# Altium PCB 掌控扩展板ASC.PcbDoc
Units mm, origin at the board's own origin, x right, y up, seen from the top; angles counter-clockwise.
Board outline 76 x 53.5 mm, 2 copper layers (Top Layer, Bottom Layer); 50 components, 37 nets, 188 pads, 49 vias.
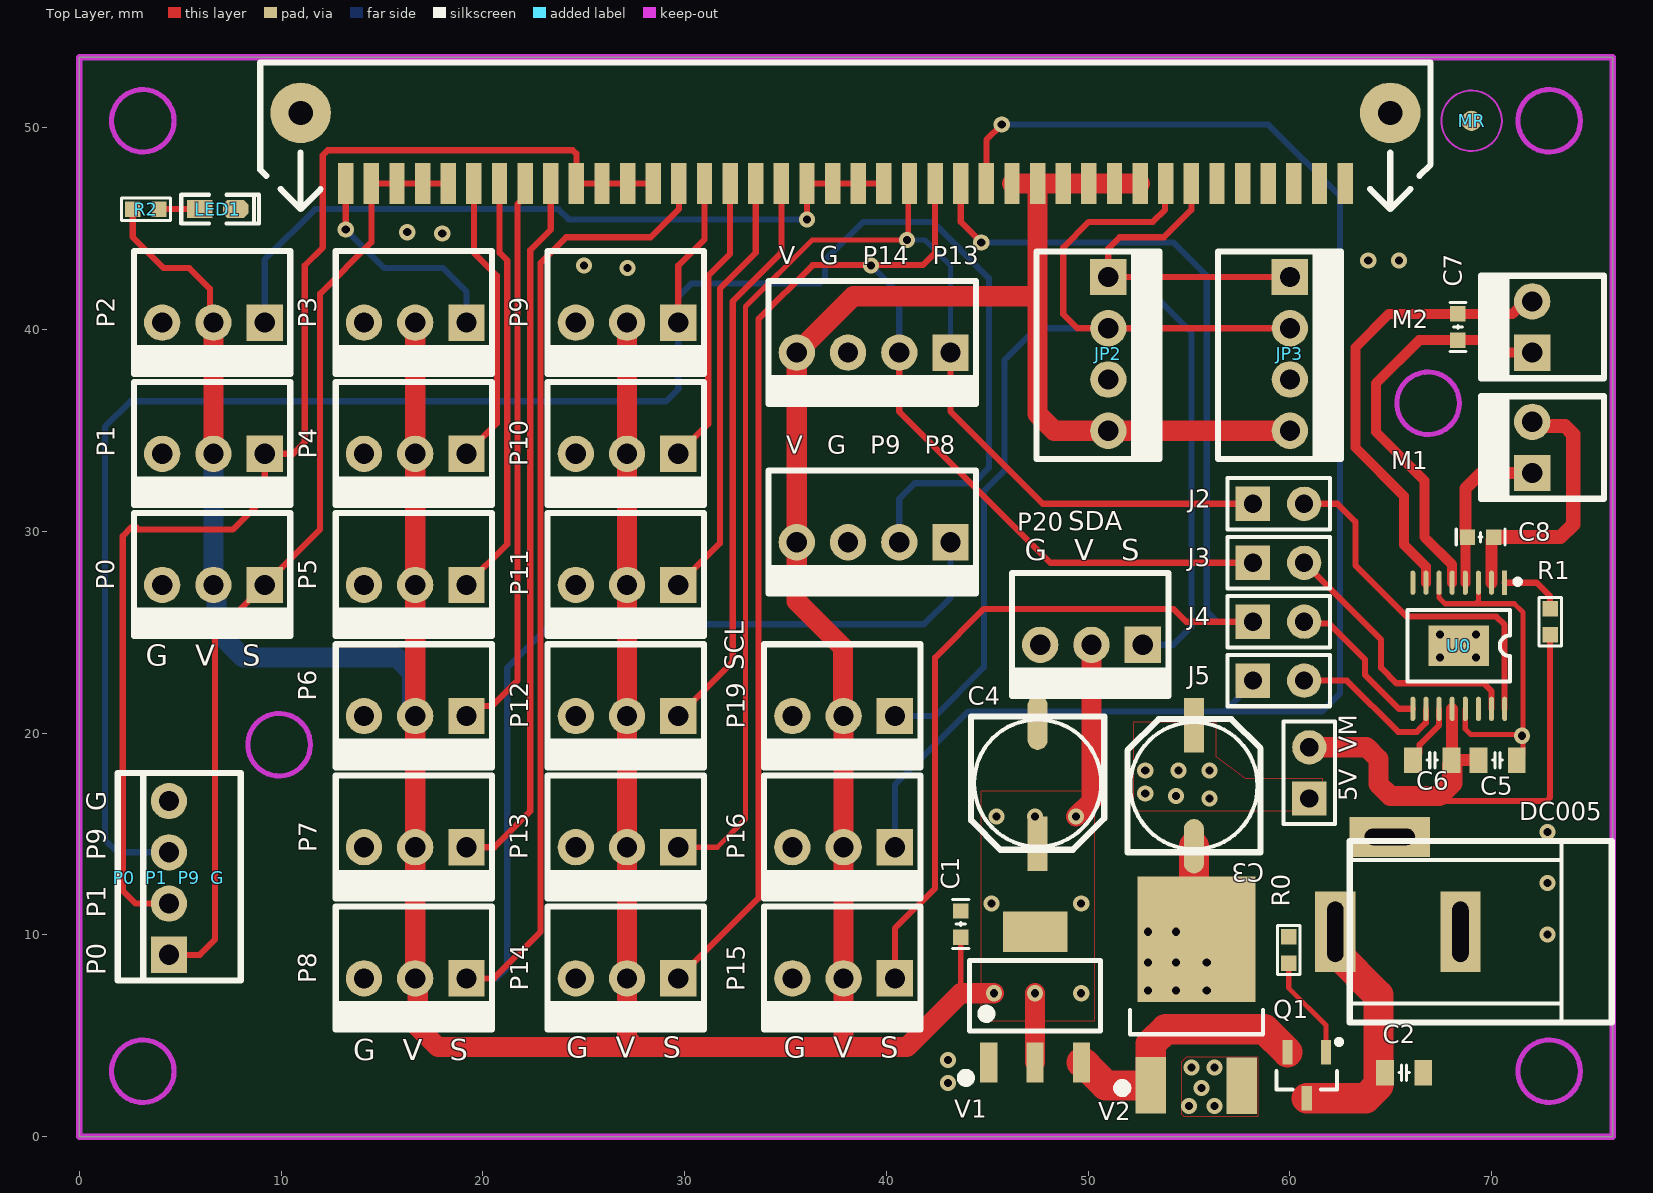
[diagram p0: Top Layer view]
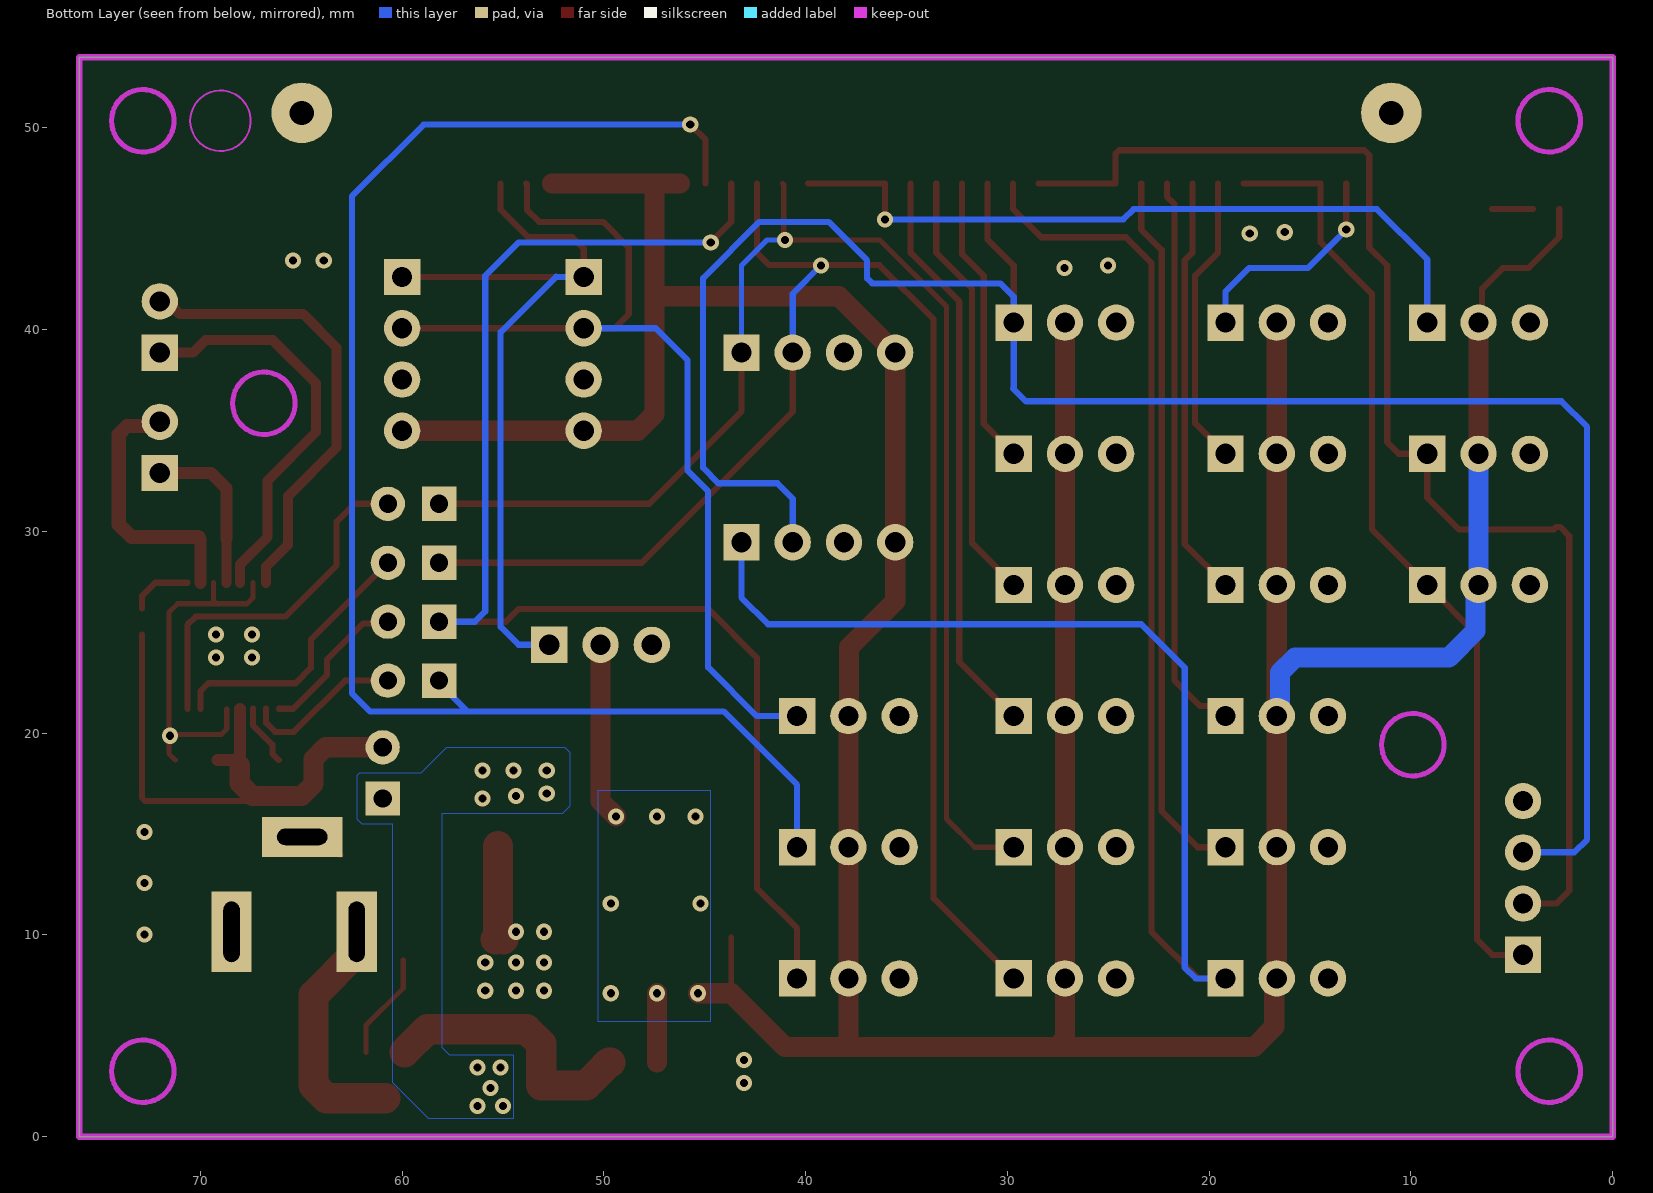
[diagram p1: Bottom Layer view, seen from below]

## Layer stack, top to bottom
Top Solder: solder mask 0.0102, Solder Resist, Dk 3.5
Top Layer: signal copper 0.0356
Dielectric 1: dielectric 0.32, FR-4, Dk 4.8
Bottom Layer: signal copper 0.0356
Bottom Solder: solder mask 0.0102, Solder Resist, Dk 3.5

## Board outline
0,0 0,53.5 76,53.5 76,0

## Design rules (kind name [scope] priority, off if disabled: settings)
AssemblyTestPointUsage [All] p0: scope1count=1 scope1_0_kind=Board scope1_0_value=Board scope2count=1 scope2_0_kind=Board scope2_0_value=Board commentlength=0
AssemblyTestpoint [All] p0: scope1count=1 scope1_0_kind=Board scope1_0_value=Board scope2count=1 scope2_0_kind=Board scope2_0_value=Board commentlength=0
Clearance [All] p0: scope1count=1 scope1_0_kind=Board scope1_0_value=Board scope2count=1 scope2_0_kind=Board scope2_0_value=Board commentlength=0 gap=0.152
Clearance [All] p1: gap=0.152 ignorepadtopadclearanceinfootprint=FALSE
ComponentClearance [All] p0: scope1count=1 scope1_0_kind=Board scope1_0_value=Board scope2count=1 scope2_0_kind=Board scope2_0_value=Board commentlength=0 gap=0.254 collisioncheckmode=3
DiffPairsRouting [All] p0: scope1count=1 scope1_0_kind=Board scope1_0_value=Board scope2count=1 scope2_0_kind=Board scope2_0_value=Board commentlength=0
FabricationTestPointUsage [All] p0: scope1count=1 scope1_0_kind=Board scope1_0_value=Board scope2count=1 scope2_0_kind=Board scope2_0_value=Board commentlength=0 valid=0 allowmultiple=FALSE
FabricationTestpoint [All] p0: scope1count=1 scope1_0_kind=Board scope1_0_value=Board scope2count=1 scope2_0_kind=Board scope2_0_value=Board commentlength=0 side=3 testpointundercomponent=TRUE minsize=1.016 maxsize=2.54 preferedsize=1.524 minholesize=0 maxholesize=1.016 preferedholesize=0.813 testpointgrid=0.025
FanoutControl Fanout_BGA [All] p0 off: scope1count=1 scope1_0_kind=Board scope1_0_value=Board scope2count=1 scope2_0_kind=Board scope2_0_value=Board commentlength=69 // Protel DXP Scope 1 Expression Was: IsBGA   Fanout_BGA (Default Rule)
FanoutControl Fanout_LCC [All] p0 off: scope1count=1 scope1_0_kind=Board scope1_0_value=Board scope2count=1 scope2_0_kind=Board scope2_0_value=Board commentlength=69 // Protel DXP Scope 1 Expression Was: IsLCC   Fanout_LCC (Default Rule)
FanoutControl Fanout_SOIC [All] p0 off: scope1count=1 scope1_0_kind=Board scope1_0_value=Board scope2count=1 scope2_0_kind=Board scope2_0_value=Board commentlength=71 // Protel DXP Scope 1 Expression Was: IsSOIC   Fanout_SOIC (Default Rule)
FanoutControl Fanout_Small [All] p0 off: scope1count=1 scope1_0_kind=Board scope1_0_value=Board scope2count=1 scope2_0_kind=Board scope2_0_value=Board commentlength=84 // Protel DXP Scope 1 Expression Was: (CompPinCount < 5)   Fanout_Small (Default Rule)
FanoutControl Fanout_Default [All] p0: scope1count=1 scope1_0_kind=Board scope1_0_value=Board scope2count=1 scope2_0_kind=Board scope2_0_value=Board commentlength=30 // Fanout_Default (Default Rule)
Height [All] p0: scope1count=1 scope1_0_kind=Board scope1_0_value=Board scope2count=1 scope2_0_kind=Board scope2_0_value=Board commentlength=0
HoleSize [All] p0: scope1count=1 scope1_0_kind=Board scope1_0_value=Board scope2count=1 scope2_0_kind=Board scope2_0_value=Board commentlength=0 absolutevalues=TRUE maxlimit=2.54 minlimit=0.025 maxpercent=80.000 minpercent=20.000
HoleToHoleClearance [All] p0: scope1count=1 scope1_0_kind=Board scope1_0_value=Board scope2count=1 scope2_0_kind=Board scope2_0_value=Board commentlength=0
LayerPairs [All] p0: scope1count=1 scope1_0_kind=Board scope1_0_value=Board scope2count=1 scope2_0_kind=Board scope2_0_value=Board commentlength=0 enforce=TRUE
MinimumSolderMaskSliver [All] p0: scope1count=1 scope1_0_kind=Board scope1_0_value=Board scope2count=1 scope2_0_kind=Board scope2_0_value=Board commentlength=0
NetAntennae [All] p0: scope1count=1 scope1_0_kind=Board scope1_0_value=Board scope2count=1 scope2_0_kind=Board scope2_0_value=Board commentlength=0
PasteMaskExpansion [All] p0: scope1count=1 scope1_0_kind=Board scope1_0_value=Board scope2count=1 scope2_0_kind=Board scope2_0_value=Board commentlength=0 expansion=0
PlaneClearance [All] p0: scope1count=1 scope1_0_kind=Board scope1_0_value=Board scope2count=1 scope2_0_kind=Board scope2_0_value=Board commentlength=0 clearance=0.254
PlaneClearance [All] p1: clearance=0.254
PlaneConnect [All] p0: scope1count=1 scope1_0_kind=Board scope1_0_value=Board scope2count=1 scope2_0_kind=Board scope2_0_value=Board commentlength=0 planeconnectstyle=Relief reliefexpansion=0.508 reliefentries=4 reliefconductorwidth=0.254 reliefairgap=0.254
PlaneConnect [All] p1: pad.planeconnectstyle=Relief pad.reliefexpansion=0.508 pad.reliefentries=4 pad.reliefconductorwidth=0.254 pad.reliefairgap=0.254 via.planeconnectstyle=Direct via.reliefexpansion=0.508 via.reliefentries=4 via.reliefconductorwidth=0.254 via.reliefairgap=0.254
PolygonConnect [All] p0: scope1count=1 scope1_0_kind=Board scope1_0_value=Board scope2count=1 scope2_0_kind=Board scope2_0_value=Board commentlength=0 connectstyle=Relief reliefconductorwidth=0.305 reliefentries=4 polygonreliefangle="90 Angle"
PolygonConnect [All] p1: thpad.connectstyle=Relief thpad.reliefconductorwidth=0.305 thpad.reliefentries=4 thpad.polygonreliefangle="90 Angle" thpad.airgapwidth=0.254 smdpad.connectstyle=Direct smdpad.reliefconductorwidth=0.254 smdpad.reliefentries=4 smdpad.polygonreliefangle="90 Angle" smdpad.airgapwidth=0.254 via.connectstyle=Direct via.reliefconductorwidth=0.254 via.reliefentries=4 via.polygonreliefangle="90 Angle" via.airgapwidth=0.254
RoutingCorners [All] p0: scope1count=1 scope1_0_kind=Board scope1_0_value=Board scope2count=1 scope2_0_kind=Board scope2_0_value=Board commentlength=0 cornerstyle=45-Degree minsetback=2.54 maxsetback=2.54
RoutingLayers [All] p0: scope1count=1 scope1_0_kind=Board scope1_0_value=Board scope2count=1 scope2_0_kind=Board scope2_0_value=Board commentlength=0 top layer=Automatic bottom layer=Automatic
RoutingPriority [All] p0: scope1count=1 scope1_0_kind=Board scope1_0_value=Board scope2count=1 scope2_0_kind=Board scope2_0_value=Board commentlength=0
RoutingTopology [All] p0: scope1count=1 scope1_0_kind=Board scope1_0_value=Board scope2count=1 scope2_0_kind=Board scope2_0_value=Board commentlength=0 topology=Shortest
RoutingVias [All] p0: scope1count=1 scope1_0_kind=Board scope1_0_value=Board scope2count=1 scope2_0_kind=Board scope2_0_value=Board commentlength=0 holewidth=0.4 width=0.8 viastyle="Through Hole" minholewidth=0.3 minwidth=0.6 maxholewidth=5 maxwidth=5
RoutingVias [All] p1: holewidth=0.4 width=0.8 viastyle="Through Hole" minholewidth=0.3 minwidth=0.6 maxholewidth=5 maxwidth=5
ShortCircuit [All] p0: scope1count=1 scope1_0_kind=Board scope1_0_value=Board scope2count=1 scope2_0_kind=Board scope2_0_value=Board commentlength=0 allowed=FALSE
SilkToBoardRegionClearance [All] p0: scope1count=1 scope1_0_kind=Board scope1_0_value=Board scope2count=1 scope2_0_kind=Board scope2_0_value=Board commentlength=0
SilkToSilkClearance [All] p0: scope1count=1 scope1_0_kind=Board scope1_0_value=Board scope2count=1 scope2_0_kind=Board scope2_0_value=Board commentlength=0
SilkToSolderMaskClearance [All] p0 off: scope1count=1 scope1_0_kind=Board scope1_0_value=Board scope2count=1 scope2_0_kind=Board scope2_0_value=Board commentlength=44 // Protel DXP Scope 1 Expression Was: IsPad
SolderMaskExpansion [All] p0: scope1count=1 scope1_0_kind=Board scope1_0_value=Board scope2count=1 scope2_0_kind=Board scope2_0_value=Board commentlength=0 expansion=0.102
SolderMaskExpansion [All] p1: expansion=0.102
UnRoutedNet [All] p0: scope1count=1 scope1_0_kind=Board scope1_0_value=Board scope2count=1 scope2_0_kind=Board scope2_0_value=Board commentlength=0
UnpouredPolygon [All] p0: scope1count=1 scope1_0_kind=Board scope1_0_value=Board scope2count=1 scope2_0_kind=Board scope2_0_value=Board commentlength=0
Width [All] p0: scope1count=1 scope1_0_kind=Board scope1_0_value=Board scope2count=1 scope2_0_kind=Board scope2_0_value=Board commentlength=0 maxlimit=3 minlimit=0.254 preferedwidth=0.254
Width [All] p1: maxlimit=3 minlimit=0.254 preferedwidth=0.254
28 further rules are at their usual default settings.

## Components (designator, comment, footprint, x,y, rotation, side; value= is the part's Value field where it differs from the comment)
"5V  VM" "HDR-1X2" HDR2.54-LI-2P 60.96,18.034 r90 top
C1 "104" "C 0603_L" 43.688,10.541 r270 top
C2 "10UF" "C 0805_L" 65.659,3.175 r0 top
C3 "47uF/25V" "CM D(6.3*5.4)" 55.245,17.399 r90 top
C4 "47uF/25V" "CM D(6.3*5.4)" 47.498,17.526 r270 top
C5 "10uF" "C 0805_L" 70.292,18.669 r180 top
C6 "10nF" "C 0805_L" 67.056,18.669 r0 top
C7 "104" "C 0603_L" 68.326,40.132 r270 top
C8 "104" "C 0603_L" 69.454,29.718 r0 top
DC005 "3.5*1.3" DC-005 68.453,10.16 r0 top
J2 "HDR-1X2" HDR2.54-LI-2P 59.436,31.369 r0 top
J3 "HDR-1X2" HDR2.54-LI-2P 59.436,28.448 r0 top
J4 "HDR-1X2" HDR2.54-LI-2P 59.436,25.527 r0 top
J5 "HDR-1X2" HDR2.54-LI-2P 59.436,22.606 r0 top
JP2 "HDR-1X4" KF2510-LI-4P 51,38.8 r270 top
JP3 "HDR-1X4" KF2510-LI-4P 60,38.8 r270 top
LED1 "红色" "LED 0603R" 6.858,45.967 r0 top
M1 "HDR-1X2" KF2510-LI-2P 72.009,34.163 r90 top
M2 "HDR-1X2" KF2510-LI-2P 72.009,40.132 r90 top
MR "MARK1.6" "Mark 1" 69,50.35 r0 top
P0 "HDR-1X3" KF2510-LI-3P 6.65,27.35 r180 top
"P0  P1  P9  G" "HDR-1X4" KF2510-LI-4P 4.445,12.827 r90 top
P1 "HDR-1X3" KF2510-LI-3P 6.65,33.85 r180 top
P2 "HDR-1X3" KF2510-LI-3P 6.65,40.35 r180 top
P3 "HDR-1X3" KF2510-LI-3P 16.65,40.35 r180 top
P4 "HDR-1X3" KF2510-LI-3P 16.65,33.85 r180 top
P5 "HDR-1X3" KF2510-LI-3P 16.65,27.35 r180 top
P6 "HDR-1X3" KF2510-LI-3P 16.65,20.85 r180 top
P7 "HDR-1X3" KF2510-LI-3P 16.65,14.35 r180 top
P8 "HDR-1X3" KF2510-LI-3P 16.65,7.85 r180 top
P9 "HDR-1X3" KF2510-LI-3P 27.15,40.35 r180 top
P10 "HDR-1X3" KF2510-LI-3P 27.15,33.85 r180 top
P11 "HDR-1X3" KF2510-LI-3P 27.15,27.35 r180 top
P12 "HDR-1X3" KF2510-LI-3P 27.15,20.85 r180 top
P13 "HDR-1X3" KF2510-LI-3P 27.15,14.35 r180 top
P14 "HDR-1X3" KF2510-LI-3P 27.15,7.85 r180 top
P15 "HDR-1X3" KF2510-LI-3P 37.881,7.85 r180 top
P16 "HDR-1X3" KF2510-LI-3P 37.881,14.35 r180 top
P19 "HDR-1X3" KF2510-LI-3P 37.881,20.85 r180 top
P20 "HDR-1X3" KF2510-LI-3P 50.165,24.384 r180 top
Q1 "A1SHB" SOT23-3N 60.833,3.048 r180 top
R0 "1K" "R 0603_L" 59.944,9.256 r90 top
R1 "47K" "R 0603_L" 72.898,25.527 r90 top
R2 "1K" "R 0603_L" 3.302,45.974 r180 top
U0 "DRV8833PW" TSSOP16_L 68.367,24.334 r270 top
V1 "AMS1117-3V3" SOT223_N 47.371,6.985 r0 top
V2 "7805" TO252 55.372,5.588 r0 top
"V   G   P9   P8" "HDR-1X4" KF2510-LI-4P 39.37,29.464 r180 top (schematic designator "V G P9 P8")
"V   G   P14   P13" "HDR-1X4" KF2510-LI-4P 39.37,38.862 r180 top (schematic designator "V G P14 P13")
? "PCI40pin" PCI40PIN 37.973,47.244 r0 top

## Footprints (in the part's own frame and the unit in brackets; to place one, negate y for a bottom-side part, rotate by r counter-clockwise, add the part's x,y. Pads: shape width x height; smd on the part's side, far side on the other; paste and mask are expansions set on the pad)
"C 0603_L" [mil] "无极性贴片电容"
  rect 30x30 smd: 1(-25.59,0) 2(25.59,0)
  silkscreen extent -48,-16 48,16
"C 0805_L" [mil] "无极性贴片电容"
  rect 35x50 smd: 1(-37.4,0) 2(37.4,0)
  silkscreen extent -10,-15 10,15
"CM D(6.3*5.4)" [mm] "贴片电解电容，直径6.3mm，高5.4mm"
  rect 2.7x1 smd: 1(3,0)
  oval 2.7x1 smd: 2(-3,0)
  silkscreen extent -3.3,-3.3 3.3,3.3
DC-005 [mm] "5.5*2.1mm，DC30V,2.5A"
  rect 2x4 hole 0.8 slot 3 at 90 deg: 1(-6.2,0) 2(0,0)
  rect 4x2 hole 0.8 slot 2.5 at 0 deg: 3(-3.5,4.7)
  silkscreen extent -5.48,-4.5 7.5,4.5
HDR2.54-LI-2P [mm] "排针，2脚"
  rect 1.7x1.7 hole 0.9: 1(-1.27,0)
  round 1.7 hole 0.9: 2(1.27,0)
  silkscreen extent -2.54,-1.27 2.54,1.27
KF2510-LI-2P [mm] "接插件/2A"
  rect 1.8x1.8 hole 1: 1(-1.27,0)
  round 1.8 hole 1: 2(1.27,0)
  silkscreen extent -2.59,-3.56 2.54,2.54
KF2510-LI-3P [mm] "接插件/2A"
  rect 1.8x1.8 hole 1: 1(-2.54,0)
  round 1.8 hole 1: 2(0,0) 3(2.54,0)
  silkscreen extent -3.81,-3.56 3.94,2.54
KF2510-LI-4P [mm] "接插件/2A"
  rect 1.8x1.8 hole 1: 1(-3.81,0)
  round 1.8 hole 1: 2(-1.27,0) 3(1.27,0) 4(3.81,0)
  silkscreen extent -5.08,-3.56 5.21,2.54
"LED 0603R" [mil] "红色0603LED"
  rect 50x35 smd: 1(-35,0.26)
  oct 50x35 smd: 2(35,0.26)
  silkscreen extent -71,-28 81,28
"Mark 1" [mm] "光学定位点，直径1mm"
  round 1 smd paste-1 mask+0: Mark(0,0)
  Keep-Out Layer circle w0.1: c0,0 r1.5
PCI40PIN [mm]
  round 3 hole 1.2: 0(-27,3.5) 0(27,3.5)
  rect 0.76x2.05 smd: 1(-24.765,0) 2(-23.495,0) 3(-22.225,0) 4(-20.955,0) 5(-19.685,0) 6(-18.415,0) 7(-17.145,0) 8(-15.875,0) 9(-14.605,0) 10(-13.335,0) 11(-12.065,0) 12(-10.795,0) 13(-9.525,0) 14(-8.255,0) 15(-6.985,0) 16(-5.715,0) 17(-4.445,0) 18(-3.175,0) 19(-1.905,0) 20(-0.635,0) 21(0.635,0) 22(1.905,0) 23(3.175,0) 24(4.445,0) 25(5.715,0) 26(6.985,0) 27(8.255,0) 28(9.525,0) 29(10.795,0) 30(12.065,0) 31(13.335,0) 32(14.605,0) 33(15.875,0) 34(17.145,0) 35(18.415,0) 36(19.685,0) 37(20.955,0) 38(22.225,0) 39(23.495,0) 40(24.765,0)
  silkscreen extent -29,-1.27 29,6
"R 0603_L" [mil] "1/10W贴片电阻"
  rect 30x30 smd: 1(-25.59,0) 2(25.59,0)
  silkscreen extent -48,-22 48,22
SOT23-3N [mm] "3x1.3x1mm(长宽高)"
  rect 0.5x1.2 smd: 1(-0.95,-1.143) 2(0.95,-1.143) 3(0,1.143)
  silkscreen extent -1.73,-1.78 1.5,0.7
SOT223_N [mm] "6.4x7x1.6mm(长宽高)"
  rect 0.85x2 smd: 1(-2.3,-3.302) 2(0,-3.302) 3(2.3,-3.302)
  rect 3.2x2 smd: 2(0,3.175)
  silkscreen extent -3.63,-4.26 3.25,1.75
TO252 [mil] "252晶体管"
  rect 60x110 smd: 1(-89.55,-119.77) 3(88.45,-120.77)
  rect 230x245 smd: 2(0,165.35)
  silkscreen extent -153,-133 130,28
TSSOP16_L [mm] "5*6.4*1mm（长宽高）"
  rect 2x3 smd: 0(0,0)
  rect 1.2x0.25 smd: 1(-3.125,2.275)
  oval 1.2x0.25 smd: 2(-3.125,1.625) 3(-3.125,0.975) 4(-3.125,0.325) 5(-3.125,-0.325) 6(-3.125,-0.975) 7(-3.125,-1.625) 8(-3.125,-2.275) 9(3.125,-2.275) 10(3.125,-1.625) 11(3.125,-0.975) 12(3.125,-0.325) 13(3.125,0.325) 14(3.125,0.975) 15(3.125,1.625) 16(3.125,2.275)
  silkscreen extent -3.3,-2.54 1.78,3.05

## Part data
"5V  VM" J2 J3 J4 J5 M1 M2: library part "Header 2", "2P接插件"
C1 C2 C5 C6 C7 C8: library part C, "无极性贴片电容"
C3 C4: library part C-CM, "贴片电解电容"
DC005: library part P-DC, "低压电源接口"
JP2 JP3 "P0  P1  P9  G" "V   G   P9   P8" "V   G   P14   P13": library part "Header 4", "4P接插件"
LED1: library part LED-SMD, "贴片LED"
MR: library part MARK, "光学定位点"
P0 P1 P2 P3 P4 P5 P6 P7 P8 P9 P10 P11 P12 P13 P14 P15 P16 P19 P20: library part "Header 3", "3P接插件"
Q1: library part SI2301, "P沟道场效应管"
R0 R1 R2: library part R, "贴片电阻"
V1: library part AMS1117, "三端稳压芯片"
V2: library part 78xx, "线性稳压芯片"

## Via types
v1: diameter 0.8, hole 0.4, Top Layer to Bottom Layer, 49 vias

## Nets (pads, with @x,y where several pads share a name; then routed paths per layer and width w, separated by ;. In a path a pad name is that pad's centre, name@x,y a point inside that pad or via, vN(x,y) a via of type N, cw(c..) or ccw(c..) an arc to the next point about the centre after c; other vN are vias at no path point)
+3.3: "V   G   P9   P8.4" "V   G   P14   P13.4" ?.27 ?.28 ?.29 ?.30 ?.31 ?.32 C1.2 C4.1 JP2.4 JP3.4 P0.2 P1.2 P2.2 P3.2 P4.2 P5.2 P6.2 P7.2 P8.2 P9.2 P10.2 P11.2 P12.2 P13.2 P14.2 P15.2 P16.2 P19.2 P20.2 R2.2 V1.2 | length 231.4
  Top Layer w0.254: 43.688,7.112 C1.2
  Top Layer w0.305: R2.2 2.652,44.592 4.191,43.053 5.461,43.053 6.477,42.037 6.477,40.523 P2.2
  Top Layer w1: P1.2 P2.2 ; P3.2 P4.2 P5.2 P6.2 P7.2 P8.2 16.775,7.725 16.775,5.45 17.78,4.445 27.559,4.445 ; P9.2 P10.2 P11.2 P12.2 P13.2 P14.2 27.15,4.854 27.559,4.445 ; v1(45.339,7.112) 43.688,7.112 41.021,4.445 37.846,4.445 ; ?.27 ?.28 ; V1.2@47.371,3.683 v1(47.371,7.112) ; v1(49.403,15.875) 50.165,16.637 P20.2 ; ?.32 ?.31 ?.30 ?.29 ?.28 ; JP3.4 JP2.4 48.322,34.99 47.498,35.814 47.498,41.656 ; 27.559,4.445 37.846,4.445 ; 37.846,4.445 37.881,4.48 P15.2 P16.2 P19.2 37.846,20.885 37.846,24.257 35.56,26.543 35.56,29.464 35.56,38.862 38.354,41.656 47.498,41.656 ; 47.498,41.656 ?.28
  Bottom Layer w1: P1.2 P0.2 6.803,27.197 6.803,25.074 8.128,23.749 15.748,23.749 16.497,23 16.497,21.003 P6.2
  other v1: 49.657,7.112 45.212,11.557 49.657,11.557 45.466,15.875 47.371,15.875
+VM: "5V  VM.2" C5.2 C6.2 R1.1 U0.12 | length 28.5
  Top Layer w0.305: 66.197,16.891 66.451,16.637 72.72,16.637 72.898,16.816 R1.1
  Top Layer w0.6: C6.2@68.042,18.412 U0.12 ; C6.2@68.357,18.669 C5.2@69.149,18.669
  Top Layer w1: 60.96,19.304 63.803,19.304 64.389,18.718 64.389,17.477 64.975,16.891 66.197,16.891 67.42,16.891 68.042,17.513 C6.2@68.042,18.412
GND: "P0  P1  P9  G.4" "V   G   P9   P8.3" "V   G   P14   P13.3" ?.35 ?.36 ?.37 ?.38 ?.39 ?.40 C1.1 C2.2 C3.2 C4.2 C5.1 DC005.2 DC005.3 JP2.3 JP3.3 LED1.2 P0.3 P1.3 P2.3 P3.3 P4.3 P5.3 P6.3 P7.3 P8.3 P9.3 P10.3 P11.3 P12.3 P13.3 P14.3 P15.3 P16.3 P19.3 P20.3 R0.2 U0.0 U0.3 U0.6 U0.13 V1.1 V2.2 | length 25
  Top Layer w0.254: U0.6 67.392,26.715 67.691,26.416 69.193,26.416 ; U0.13 68.692,20.208 68.961,19.939 71.433,19.939 v1@71.56,19.812 ; U0.3 69.342,26.565 69.193,26.416 ; C5.1 71.56,18.986 v1@71.56,19.812 ; 69.193,26.416 71.12,26.416 71.56,25.976 v1@71.56,19.812
  Top Layer w0.305: DC005.3@63.063,13.97 63.953,14.86 DC005.3
  Top Layer w1.5: V2.2@54.991,9.788 V2.2@55.181,9.979 ; C3.2 55.245,9.915 V2.2
  other v1: 43.053,2.667 43.053,3.81 52.959,7.239 54.356,7.239 55.88,7.239 52.959,8.636 54.356,8.636 55.88,8.636 72.771,10.033 52.959,10.16 54.356,10.16 72.771,12.573 72.771,15.113 71.496,19.875 67.437,23.749 69.215,23.749 67.437,24.892 69.215,24.892 27.178,43.053 25.019,43.18 63.881,43.434 65.405,43.434 17.992,44.765 16.256,44.831
"Net5V  VM_1": "5V  VM.1" C3.1 V2.3
  other v1: 54.991,1.524 56.261,1.524 55.626,2.413 55.118,3.429 56.261,3.429 56.007,16.764 54.356,16.891 52.832,17.018 52.832,18.161 54.483,18.161 56.007,18.161
NetC2_1: C2.1 DC005.1 Q1.3 | length 12.3
  Top Layer w1.5: Q1.3 63.754,1.905 64.389,2.54 64.389,7.024 62.253,9.16 DC005.1
NetC6_1: C6.1 U0.11 | length 3.1
  Top Layer w0.305: C6.1 66.423,18.986 66.423,19.433 67.392,20.402 U0.11
NetC7_1: C7.1 M2.2 U0.7 | length 22.8
  Top Layer w0.5: U0.7 66.742,28.254 65.659,29.337 65.659,31.75 63.246,34.163 63.246,39.116 64.912,40.782 C7.1 71.037,40.782 71.657,41.402 M2.2
NetC7_2: C7.2 M2.1 U0.5 | length 20.3
  Top Layer w0.5: U0.5 68.042,28.351 66.675,29.718 66.675,32.512 64.262,34.925 64.262,37.338 66.406,39.482 C7.2 69.738,39.482 70.358,38.862 M2.1
NetC8_1: C8.1 M1.1 U0.4 | length 8.3
  Top Layer w0.5: U0.4@68.707,27.459 C8.1@68.707,29.621
  Top Layer w0.6: C8.1@68.707,29.621 68.707,32.131 69.469,32.893 M1.1
NetC8_2: C8.2 M1.2 U0.2 | length 13.3
  Top Layer w0.6: U0.2 69.992,29.606 C8.2
  Top Layer w0.7: C8.2 73.406,29.718 74.041,30.353 74.041,34.812 73.631,35.223 72.219,35.223 M1.2
NetJ2_2: J2.2 U0.16 | length 17.8
  Top Layer w0.305: J2.2 62.357,31.369 63.246,30.48 63.246,28.321 65.786,25.781 70.231,25.781 70.642,25.37 U0.16
NetJ3_2: J3.2 U0.15 | length 13.6
  Top Layer w0.305: J3.2 64.516,24.638 64.516,23.241 65.278,22.479 69.596,22.479 69.992,22.083 U0.15
NetJ4_2: J4.2 U0.9 | length 7.6
  Top Layer w0.305: J4.2 60.794,25.439 61.937,25.439 63.716,23.66 63.716,22.898 65.405,21.209 U0.9
NetJ5_2: J5.2 U0.10 | length 8
  Top Layer w0.305: J5.2 62.824,22.606 65.364,20.066 66.294,20.066 66.742,20.514 U0.10
NetLED1_1: LED1.1 R2.1 | length 2
  Top Layer w0.305: R2.1 LED1.1
NetQ1_1: Q1.1 R0.1 | length 5.3
  Top Layer w0.254: R0.1 R0.1@59.944,8.748 ; R0.1@59.944,8.621 59.944,7.366 61.783,5.527 Q1.1
NetQ1_2: Q1.2 V1.3 V2.1 | length 13.5
  Top Layer w1.5: V1.3 49.746,3.683 49.996,3.433 49.996,3.424 50.875,2.546 V2.1 53.109,2.558 53.109,4.606 53.838,5.334 58.74,5.334 Q1.2
NetR1_2: R1.2 U0.1 | length 3.2
  Top Layer w0.305: U0.1 72.236,27.459 72.898,26.797 R1.2
P0: "P0  P1  P9  G.1" ?.2 ?.3 ?.4 ?.5 P0.1 | length 47.1
  Top Layer w0.305: 4.445,9.017 5.969,9.017 6.731,9.779 6.731,24.891 P0.1 11.938,30.098 11.938,41.783 14.478,44.323 ?.2 ?.3 ?.4 ?.5
P1: "P0  P1  P9  G.2" ?.10 ?.11 ?.12 ?.13 P1.1 | length 65.1
  Top Layer w0.305: 4.445,11.557 2.794,11.557 2.159,12.192 2.159,29.773 2.613,30.227 2.793,30.227 2.921,30.099 7.62,30.099 9.19,31.669 P1.1 10.609,33.85 11.176,34.417 11.176,43.18 12.065,44.069 12.065,48.641 12.319,48.895 24.459,48.895 24.638,48.716 ?.10 ?.11 ?.12 ?.13
P2: ?.19 ?.20 ?.21 ?.22 P2.1 | length 36.8
  Top Layer w0.305: v1(36.068,45.466) ?.19 ?.20 ?.21 ?.22
  Bottom Layer w0.305: P2.1 9.19,43.48 11.684,45.974 23.745,45.974 24.253,45.466 v1(36.068,45.466)
P3: ?.1 P3.1 | length 11.1
  Top Layer w0.305: v1(13.208,44.958) ?.1
  Bottom Layer w0.305: v1(13.208,44.958) 15.113,43.053 18.034,43.053 19.19,41.897 P3.1
P4: ?.6 P4.1 | length 14.5
  Top Layer w0.305: P4.1 20.701,35.361 20.701,42.672 19.558,43.815 ?.6
P5: ?.7 P5.1 | length 20.9
  Top Layer w0.305: P5.1 21.209,29.369 21.209,43.434 20.828,43.815 ?.7
P6: ?.8 P6.1 | length 28.1
  Top Layer w0.305: P6.1 19.691,21.351 20.462,21.351 21.717,22.606 21.717,46.218 22.098,46.599 ?.8
P7: ?.9 P7.1 | length 35.4
  Top Layer w0.305: P7.1 20.573,14.35 22.352,16.129 22.352,43.942 23.368,44.958 ?.9
P8: "V   G   P9   P8.1" ?.14 P8.1 | length 90.3
  Top Layer w0.305: P8.1 20.55,7.85 22.86,10.16 22.86,43.307 24.13,44.577 28.321,44.577 29.718,45.974 ?.14
  Bottom Layer w0.305: P8.1 20.677,7.85 21.209,8.382 21.209,23.241 23.368,25.4 41.858,25.4 43.18,26.722 43.18,29.464
P9: "P0  P1  P9  G.3" "V   G   P9   P8.2" ?.15 P9.1 | length 100.4
  Top Layer w0.305: P9.1 29.69,43.174 30.988,44.472 ?.15
  Bottom Layer w0.305: 4.445,14.097 1.905,14.097 1.27,14.732 1.27,35.179 2.54,36.449 29.084,36.449 29.719,37.083 29.69,37.112 P9.1 29.69,41.628 30.353,42.291 36.703,42.291 36.957,42.545 36.957,43.434 38.862,45.339 42.291,45.339 45.085,42.545 45.085,33.147 44.323,32.385 41.402,32.385 40.64,31.623 40.64,29.464
P10: ?.16 P10.1 | length 14.5
  Top Layer w0.305: P10.1 31.171,35.331 31.171,42.672 32.258,43.759 ?.16
P11: ?.17 P11.1 | length 21.5
  Top Layer w0.305: P11.1 31.75,29.41 31.75,42.037 33.528,43.815 ?.17
P12: ?.18 P12.1 | length 28.5
  Top Layer w0.305: P12.1 32.385,23.545 32.385,41.402 34.798,43.815 ?.18
P13: "V   G   P14   P13.1" ?.23 J2.1 P13.1 | length 68.3
  Top Layer w0.254: P13.1 31.622,14.35 33.02,15.748 33.02,41.148 36.322,44.45 v1(41.021,44.45) 41.084,44.514 41.084,47.18 ?.23
  Top Layer w0.305: 43.18,38.862 43.18,35.941 47.752,31.369 J2.1
  Bottom Layer w0.254: v1(41.021,44.45) 41.91,44.45 43.18,43.18 43.18,38.862
P14: "V   G   P14   P13.2" ?.24 J3.1 P14.1 | length 76.3
  Top Layer w0.305: P14.1 33.655,11.815 33.655,40.513 36.34,43.198 39.225,43.198 v1(39.243,43.18) 39.261,43.198 41.801,43.198 42.419,43.816 42.419,45.093 ; 40.64,38.862 40.64,35.941 48.133,28.448 J3.1 ; 42.418,45.094 ?.24
  Bottom Layer w0.305: v1(39.243,43.18) 40.64,41.783 40.64,38.862
P15: ?.25 J4.1 P15.1 | length 68.2
  Top Layer w0.305: P15.1 40.421,10.322 42.418,12.319 42.418,23.749 44.831,26.162 54.229,26.162 54.864,25.527 J4.1 ; ?.25 43.688,45.339 v1(44.704,44.323) v1@44.57,44.323
  Bottom Layer w0.305: v1(44.704,44.323) 54.229,44.323 55.88,42.672 55.88,26.035 56.388,25.527 J4.1
P16: ?.26 J5.1 P16.1 | length 75.2
  Top Layer w0.305: ?.26 44.958,49.403 v1(45.72,50.165)
  Bottom Layer w0.305: P16.1 40.421,17.434 44.069,21.082 56.769,21.082 ; v1(45.72,50.165) 58.928,50.165 62.484,46.609 62.484,21.971 61.595,21.082 56.769,21.082 ; J5.1 57.468,21.908 57.468,21.781 56.769,21.082
P19: ?.33 JP2.2 JP3.2 P19.1 | length 48.8
  Top Layer w0.305: ?.33 53.814,47.21 53.814,45.94 53.213,45.339 50.038,45.339 48.768,44.069 48.768,40.767 49.465,40.07 JP2.2 JP3.2
  Bottom Layer w0.305: P19.1 42.418,20.85 44.831,23.263 44.831,32.004 45.847,33.02 45.847,38.481 47.436,40.07 JP2.2
P20: ?.34 JP2.1 JP3.1 P20.1 | length 39.3
  Top Layer w0.305: ?.34 55.118,45.94 53.755,44.577 51.562,44.577 51,44.015 JP2.1 JP3.1
  Bottom Layer w0.305: JP2.1 52.357,42.61 52.369,42.622 55.118,39.873 55.118,25.273 54.229,24.384 P20.1
pads on no net: ?.0 MR.Mark U0.8 U0.14

## Polygon pours and split planes (outlines as drawn)
GND on Top Layer "GND_L01_P015" (solid, remove dead copper, pour order 15): 0,53.467 0,0.127 0.127,0 75.946,0 75.946,53.467
"Net5V  VM_1" on Top Layer "NET5V__VM_1_L01_P012" (solid, pour order 12): 52.26,20.574 56.325,20.574 56.325,18.869 57.785,17.78 61.595,17.78 61.595,16.129 52.26,16.129
"Net5V  VM_1" on Top Layer "NET5V__VM_1_L01_P011" (solid, pour order 11): 58.42,3.937 54.864,3.937 54.61,3.683 54.61,1.143 54.737,1.016 58.42,1.016
+3.3 on Top Layer "+3.3_L01_P002" (solid, remove dead copper, pour order 2): 50.292,5.715 44.704,5.715 44.704,17.145 50.292,17.145
GND on Bottom Layer "GND_L02_P016" (solid, remove dead copper, pour order 16): 0,53.467 0,0.127 0.127,0 75.946,0 75.946,53.467
"Net5V  VM_1" on Bottom Layer "NET5V__VM_1_L02_P014" (solid, pour order 14): 54.483,0.889 58.674,0.889 60.452,2.667 60.452,15.494 61.976,15.494 62.23,15.748 62.23,17.907 62.103,18.034 59.055,18.034 57.785,19.304 52.451,19.304 51.943,19.304 51.689,19.05 51.689,16.383 52.07,16.002 58.039,16.002 58.039,4.445 57.658,4.064 54.483,4.064
+3.3 on Bottom Layer "+3.3_L02_P006" (solid, pour order 6): 50.292,5.715 44.704,5.715 44.704,17.145 50.292,17.145

## Keep-outs
Keep-Out Layer:
  circle w0.254: c72.85,50.35 r1.55
  circle w0.254: c72.85,3.25 r1.55
  circle w0.254: c9.906,19.431 r1.55
  circle w0.254: c66.85,36.35 r1.55
  circle w0.254: c3.15,3.25 r1.55
  circle w0.254: c3.15,50.35 r1.55
  lines w0.305: 0,0 76,0 76,53.501 0.001,53.501 0.001,0.001

## Silkscreen, mask and mechanical layers (free items; w line width, h text height)
Top Overlay:
  text "SDA" at 49.022,29.736 h1.6
  text "G   V   S" at 46.863,28.214 h1.8
  text "SCL" at 33.256,23.114 h1.6 r90
  text "G   V   S" at 3.302,23.007 h1.8
  text "P0   P1   P9  G" at 1.633,8.001 h1.6 r90
  text "G   V   S" at 24.13,3.576 h1.8
  text "G   V   S" at 34.925,3.576 h1.8
  text "G   V   S" at 13.589,3.449 h1.8
Mechanical 1:
  circle w0.254: c72.85,50.35 r1.55
  circle w0.254: c72.85,3.25 r1.55
  circle w0.254: c66.85,36.35 r1.55
  circle w0.254: c9.906,19.431 r1.55
  circle w0.254: c3.15,50.35 r1.55
  circle w0.254: c3.15,3.25 r1.55
  lines w0.305: 0,0 0,53.5 76,53.5 76,0 0,0